# Altium PCB MCU_Board.PcbDoc
Units mil, origin at the board's own origin, x right, y up, seen from the top; angles counter-clockwise.
Board outline 2220 x 2405 mil, 2 copper layers (Top Layer, Bottom Layer); 38 components, 116 nets, 291 pads, 106 vias.
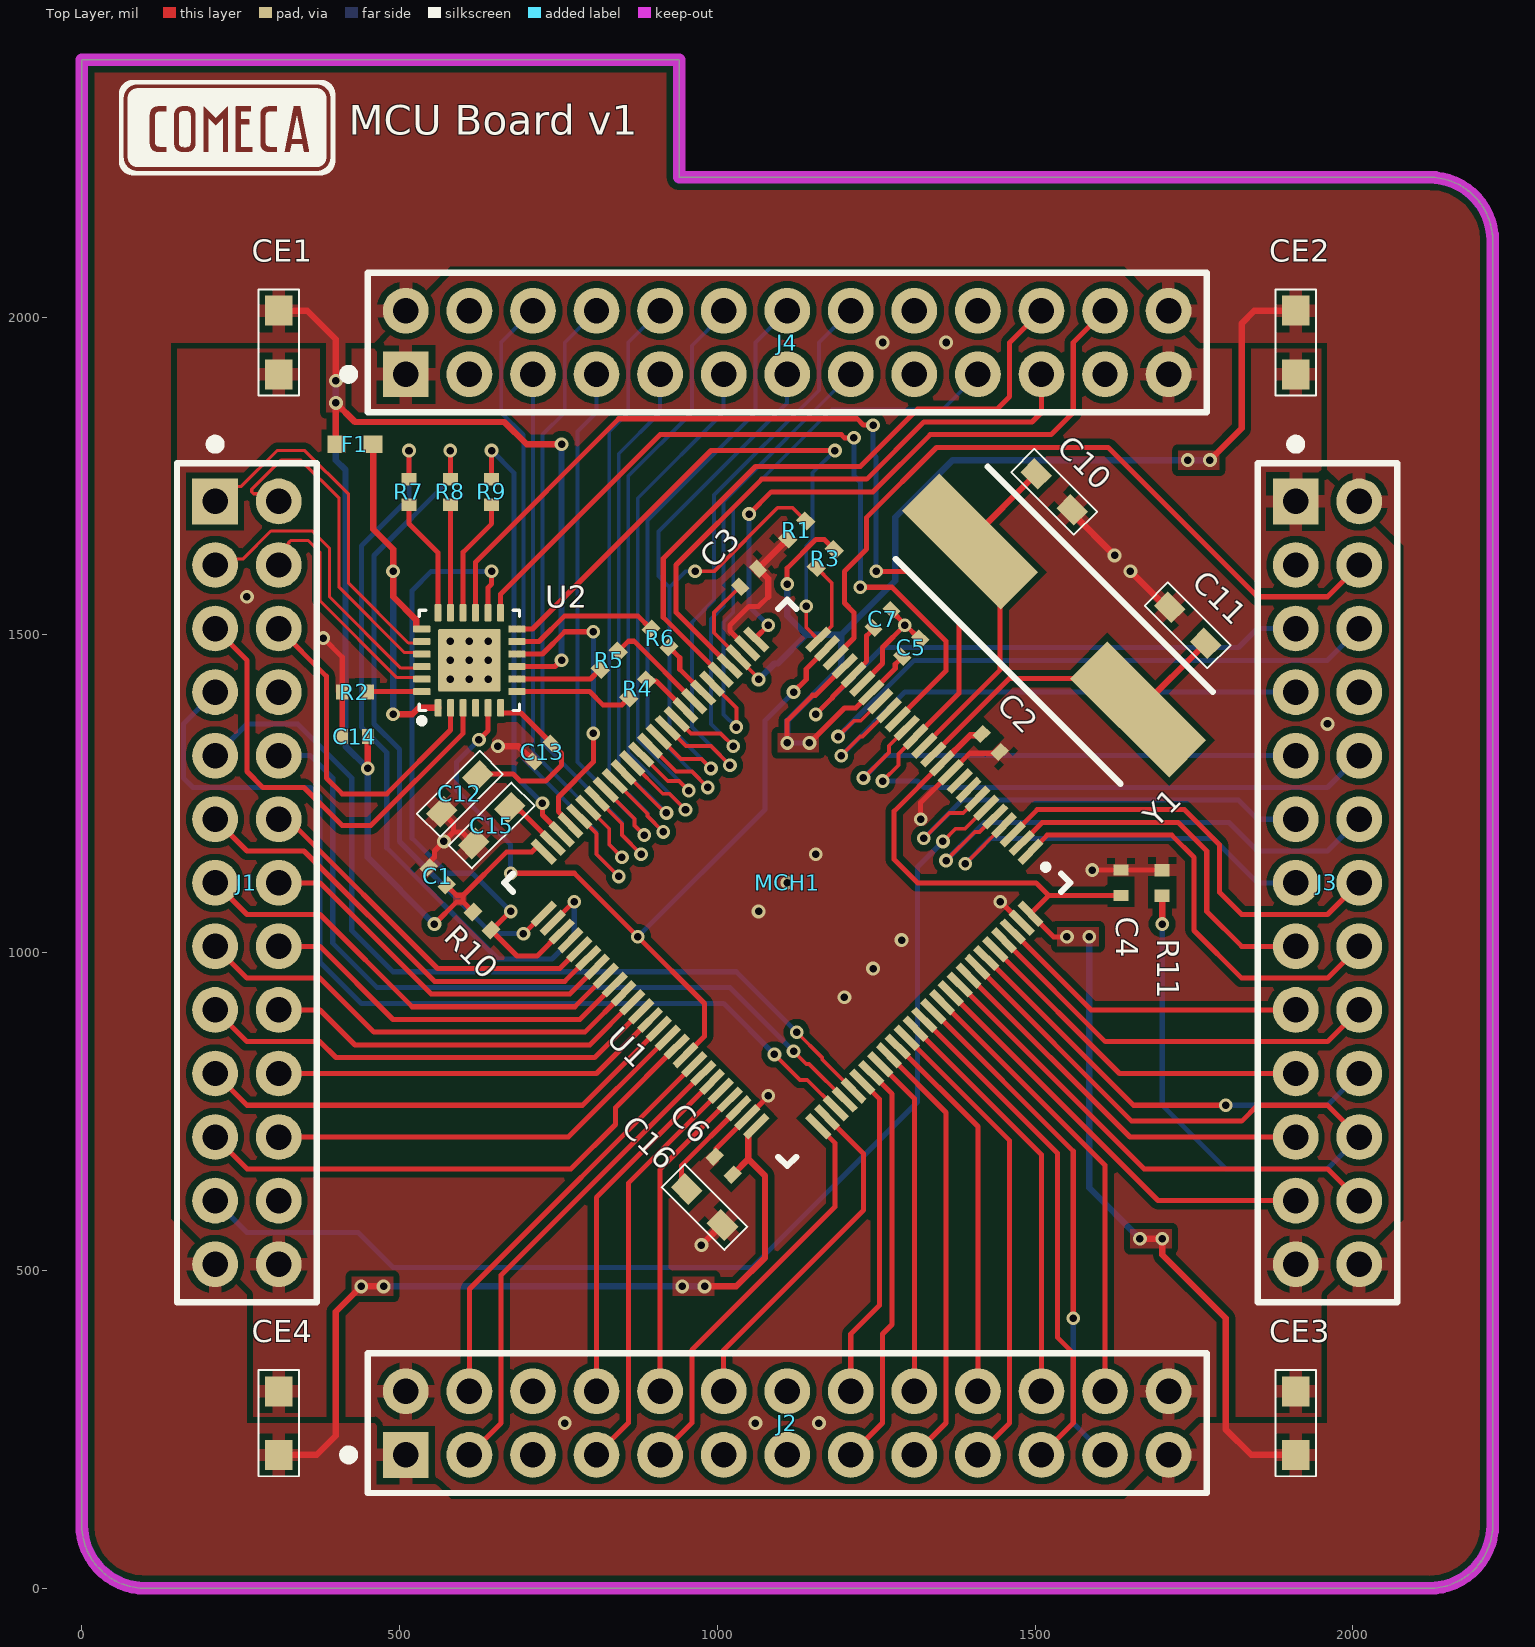
[diagram p0: Top Layer view]
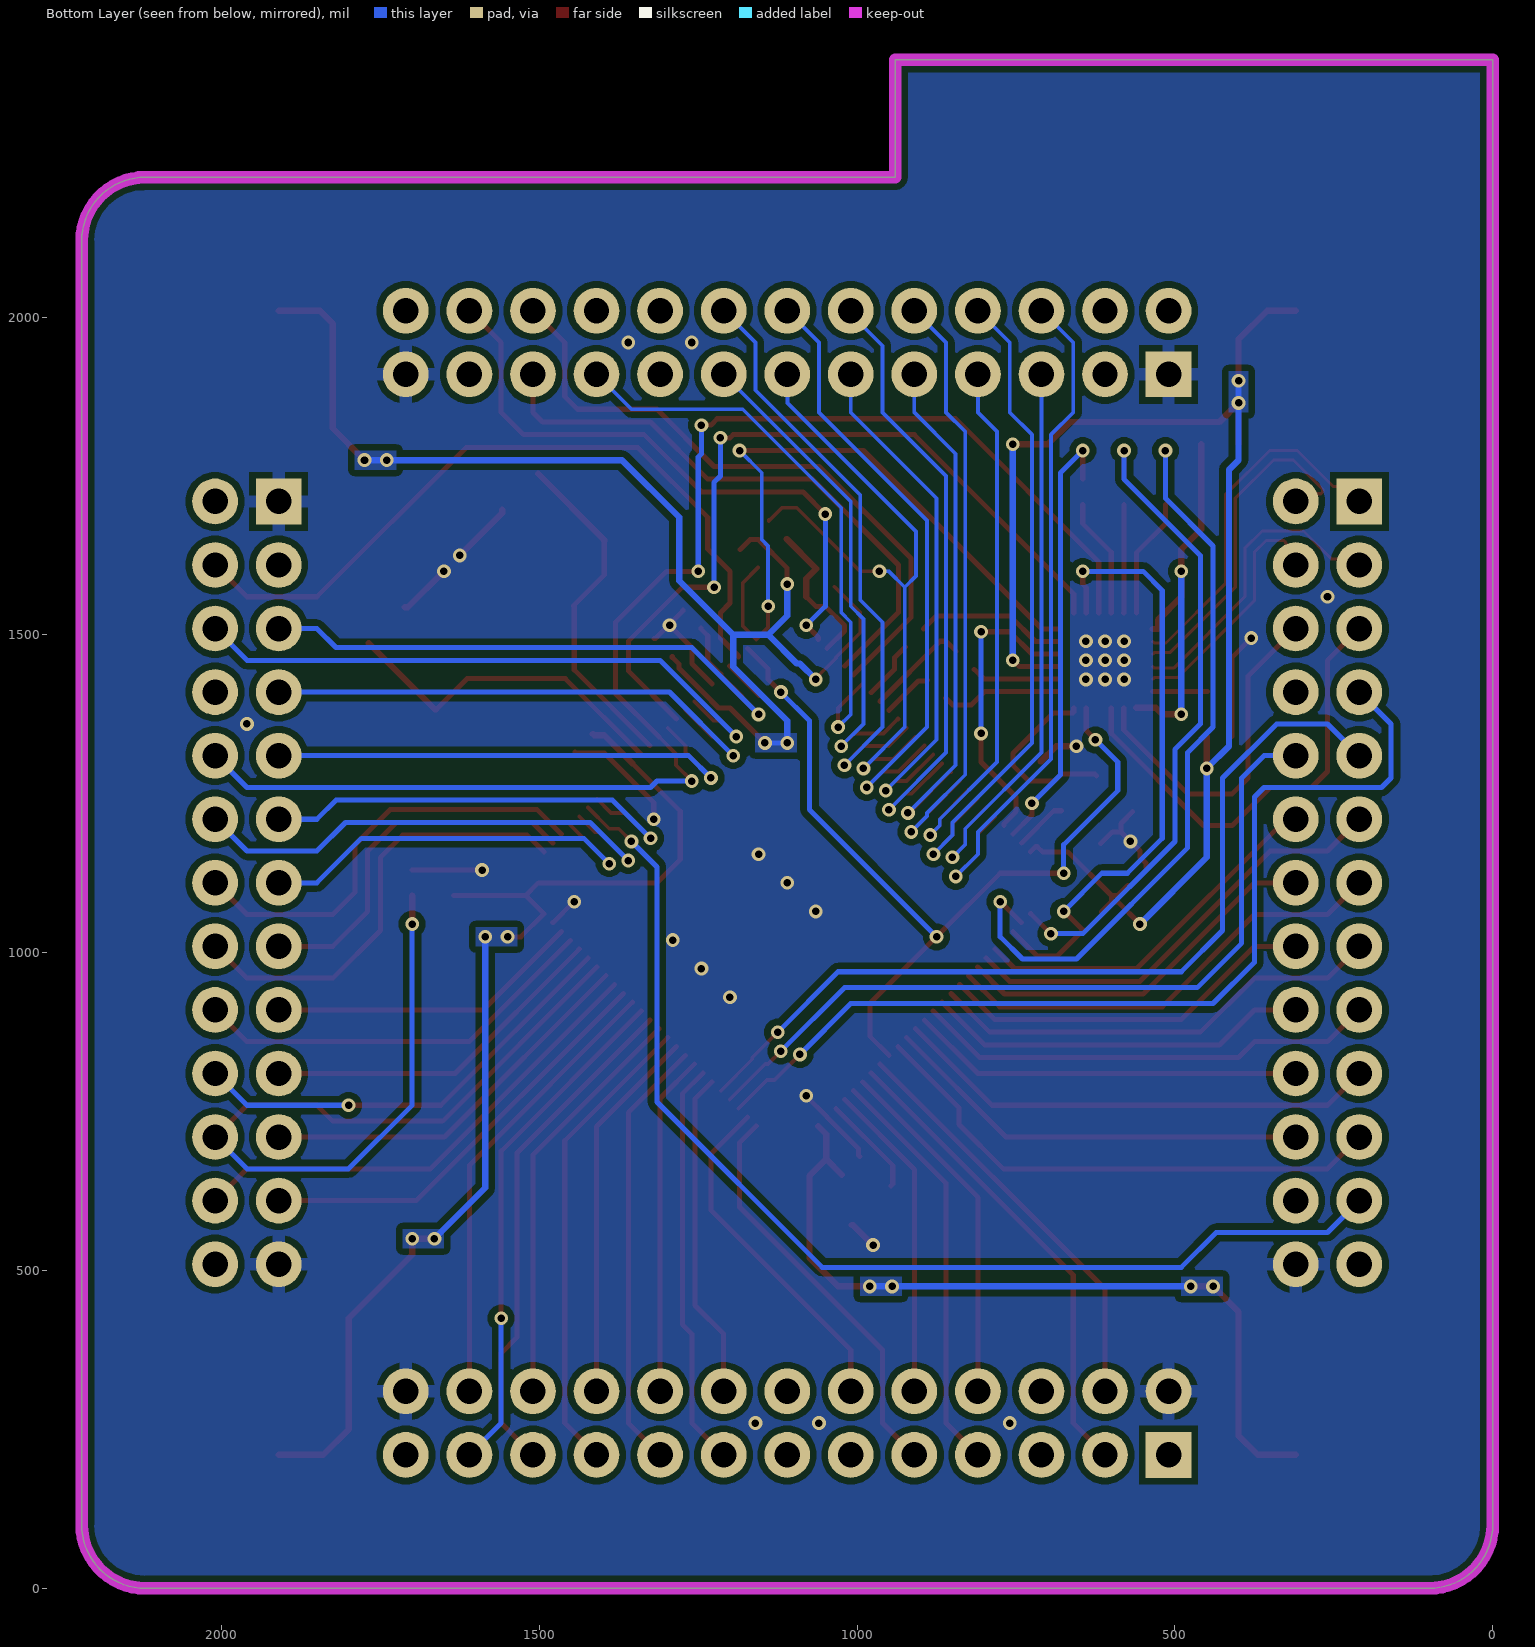
[diagram p1: Bottom Layer view, seen from below]
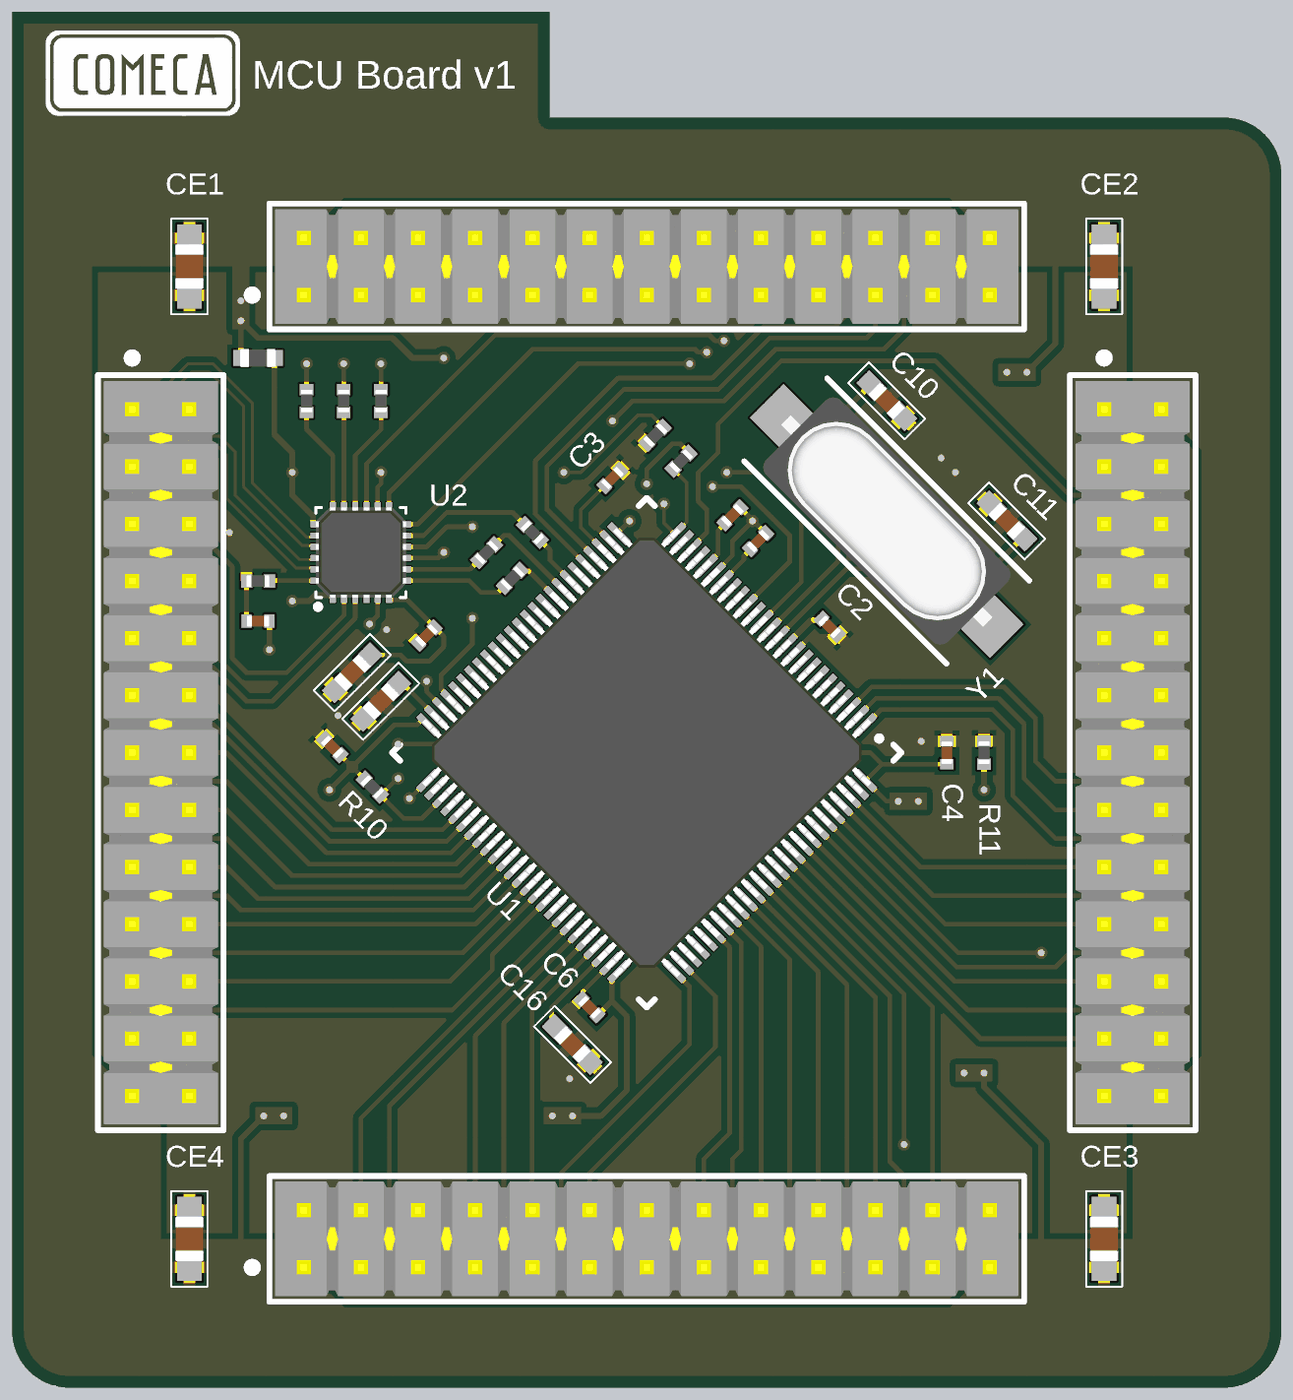
[diagram p2: 3D render of the assembled board from above, using the file's embedded part models]

## Layer stack, top to bottom
Top Solder: solder mask 0.4, Solder Resist, Dk 3.5
Top Layer: signal copper 1.4
Dielectric 1: dielectric 12.6, FR-4, Dk 4.8
Bottom Layer: signal copper 1.4
Bottom Solder: solder mask 0.4, Solder Resist, Dk 3.5

## Board outline
100,0 cw(c100,100) 0,100 0,2405 940,2405 940,2220 2120,2220 cw(c2120,2120) 2220,2120 2220,100 cw(c2120,100) 2120,0

## Design rules (kind name [scope] priority, off if disabled: settings)
BoardOutlineClearance [All] p1: gap=7.87 ignorepadtopadclearanceinfootprint=FALSE except(15.75: Arc-SplitBarrior Arc-SplitContinuation Track-SplitBarrior Track-SplitContinuation SMDPad-SplitBarrior SMDPad-SplitContinuation THPad-SplitBarrior THPad-SplitContinuation Via-SplitBarrior Via-SplitContinuation Fill-SplitBarrior Fill-SplitContinuation Poly-SplitBarrior Poly-SplitContinuation Region-SplitBarrior Region-SplitContinuation Text-SplitBarrior Text-SplitContinuation)
Clearance Clearance_Polygon [InPolygon] p1: gap=10 ignorepadtopadclearanceinfootprint=FALSE
Clearance Clearance_PolyPoly [InPolygon vs InPolygon] p2: gap=20 ignorepadtopadclearanceinfootprint=FALSE
Clearance "Clearance Bottom Layer" [OnLayer('Bottom Layer')] p3: gap=8 ignorepadtopadclearanceinfootprint=TRUE except(10: Arc-Text Track-Text SMDPad-Text THPad-Text Via-Text Fill-Text Poly-Text Region-Text Text-Text)
Clearance "Clearance Top Layer" [OnLayer('Top Layer')] p4: gap=8 ignorepadtopadclearanceinfootprint=TRUE except(10: Arc-Text Track-Text SMDPad-Text THPad-Text Via-Text Fill-Text Poly-Text Region-Text Text-Text)
Clearance [All] p5: gap=7.87 ignorepadtopadclearanceinfootprint=FALSE except(3.5: Arc-Arc Arc-Track Arc-SMDPad Track-Track Track-SMDPad SMDPad-SMDPad; 5: Arc-Via Track-Via SMDPad-Via THPad-Via Via-Via; 10: Arc-Text Track-Text SMDPad-Text THPad-Text Via-Text Fill-Text Poly-Text Region-Text Text-Text)
ComponentClearance MCH_Clearance [InComponent('MCH1')] p1: gap=-1 collisioncheckmode=3 verticalgap=-1 showdistances=FALSE
ComponentClearance [All] p2: gap=10 collisioncheckmode=3 verticalgap=10 showdistances=FALSE
DiffPairsRouting [All] p1: maxlimit=10 minlimit=5 mostfreqgap=10 toplayer_minwidth=5 toplayer_maxwidth=15 toplayer_prefwidth=15 bottomlayer_minwidth=5 bottomlayer_maxwidth=15 bottomlayer_prefwidth=15 maxuncoupledlength=500
HoleSize [All] p1: absolutevalues=TRUE maxlimit=248.03 minlimit=7.87 maxpercent=80.000 minpercent=20.000
MinimumAnnularRing [All] p1: minimumring=3
MinimumSolderMaskSliver [All] p1: minsoldermaskwidth=3.94
PolygonConnect PolygonConnect_1 [All] p1: thpad.connectstyle=Relief thpad.reliefconductorwidth=20 thpad.reliefentries=4 thpad.polygonreliefangle="90 Angle" thpad.airgapwidth=10 smdpad.connectstyle=Relief smdpad.reliefconductorwidth=20 smdpad.reliefentries=4 smdpad.polygonreliefangle="90 Angle" smdpad.airgapwidth=10 via.connectstyle=Direct via.reliefconductorwidth=20 via.reliefentries=4 via.polygonreliefangle="90 Angle" via.airgapwidth=10
RoutingCorners [All] p1: cornerstyle=Round minsetback=100 maxsetback=100
RoutingVias [All] p1: holewidth=19.68 width=39.37 viastyle="Through Hole" minholewidth=7.87 minwidth=17.72 maxholewidth=39.37 maxwidth=78.74
SilkToSilkClearance [All] p1: silktosilkclearance=3.94
SilkToSolderMaskClearance [IsPad] p1: minsilkscreentomaskgap=3.94 clearancetoexposedcopper=TRUE
SolderMaskExpansion [All] p1: expansion=4 istentingtop=FALSE
Width [All] p1: maxlimit=100 minlimit=5 preferedwidth=15 minimp=50.000000 maximp=50.000000 favimp=50.000000
23 further rules are at their usual default settings.

## Classes and differential pairs
differential pair class ETH: RX TX
component class UC: C1 C2 C3 C4 C5 C6 C7 C10 C11 C15 C16 CE1 CE2 CE3 CE4 R1 R11 U1 Y1
component class HDx: J1 J2 J3 J4 MCH1
component class ETH: C12 C13 C14 F1 R2 R3 R4 R5 R6 R7 R8 R9 R10 U2
differential pair TX: +TX_P -TX_N
differential pair RX: +RX_P -RX_N

## Components (designator, comment, footprint, x,y, rotation, side; value= is the part's Value field where it differs from the comment)
C1 "100nF" 0402-CAP-TDK 560,1120 r315 top
C2 "100nF" 0402-CAP-TDK 1430,1330 r135 top
C3 "100nF" 0402-CAP-TDK 1050,1590 r225 top
C4 "100nF" 0402-CAP-TDK 1635,1110 r270 top
C5 "100nF" 0402-CAP-TDK 1305,1480 r225 top
C6 "100nF" 0402-CAP-TDK 1010,665 r315 top
C7 "100nF" 0402-CAP-TDK 1260,1525 r45 top
C10 "22pF" 0603-CAP-TDK 1530,1725 r135 top
C11 "22pF" 0603-CAP-TDK 1740,1515 r315 top
C12 "2.2uF" 0603-CAP-TDK 595,1250 r45 top
C13 "100nF" 0402-CAP-TDK 725,1315 r45 top
C14 "100nF" 0402-CAP-TDK 430,1340 r0 top
C15 "2.2uF" 0603-CAP-TDK 645,1200 r45 top
C16 "2.2uF" 0603-CAP-TDK 980,600 r135 top
CE1 "10uF" 0805-CAP-TDK 310,1960 r90 top locked
CE2 "10uF" 0805-CAP-TDK 1910,1960 r90 top locked
CE3 "10uF" 0805-CAP-TDK 1910,260 r270 top locked
CE4 "10uF" 0805-CAP-TDK 310,260 r270 top locked
F1 "120R@100MHz" 0603-IND-MURATA 430,1800 r180 top
J1 "CON13X2" SIP13X2 260,1110 r270 top locked
J2 "CON13X2" SIP13X2 1110,260 r0 top locked
J3 "CON13X2" SIP13X2 1960,1110 r270 top locked
J4 "CON13X2" SIP13X2 1110,1960 r0 top locked
MCH1 "EASYMX-PRO-V7-SIP-GUIDE" EASYMX-PRO-V7-MCH-GUIDE 1110,1110 r0 top locked
R1 "100K" 0402-RES-PANASONIC 1125,1665 r45 top
R2 "12K1" 0402-RES-PANASONIC 430,1410 r0 top
R3 "1K5" 0402-RES-PANASONIC 1170,1620 r225 top
R4 "27" 0402-RES-PANASONIC 875,1415 r225 top
R5 "27" 0402-RES-PANASONIC 830,1460 r225 top
R6 "27" 0402-RES-PANASONIC 910,1495 r135 top
R7 "27" 0402-RES-PANASONIC 515,1725 r270 top
R8 "27" 0402-RES-PANASONIC 580,1725 r270 top
R9 "27" 0402-RES-PANASONIC 645,1725 r270 top
R10 "10K" 0402-RES-PANASONIC 630,1050 r315 top
R11 "100K" 0402-RES-PANASONIC 1700,1110 r90 top
U1 "STM32F407VGT6" LQFP-100 1110,1110 r135 top locked
U2 "LAN8720A-CP" "MC 24-QFN-PUNCH" 610,1460 r90 top locked
Y1 "ABLS-LR-25.000MHZ-F-T" HC49S 1530,1515 r135 top locked

## Footprints (in the part's own frame and the unit in brackets; to place one, negate y for a bottom-side part, rotate by r counter-clockwise, add the part's x,y. Pads: shape width x height; smd on the part's side, far side on the other; paste and mask are expansions set on the pad)
0402-CAP-TDK [mm]
  rect 0.45x0.6 smd: 1(-0.508,0) 2(0.508,0)
  body extent -0.5,-0.25 0.5,0.25, height 0.55
0402-RES-PANASONIC [mm]
  rect 0.5x0.6 smd: 1(-0.508,0) 2(0.508,0)
  body extent -0.5,-0.25 0.5,0.25, height 0.35
0603-CAP-TDK [mm]
  rect 1x0.8 smd: 1(-1.016,0) 2(1.016,0)
  silkscreen extent -1.77,-0.65 1.77,0.65, body extent -0.8,-0.4 0.8,0.4, height 0.9
0603-IND-MURATA [mm]
  rect 0.75x0.7 smd: 1(-0.725,0) 2(0.725,0)
  body extent -0.8,-0.4 0.8,0.4, height 0.96
0805-CAP-TDK [mm]
  rect 1.2x1.1 smd: 1(-1.27,0) 2(1.27,0)
  silkscreen extent -2.12,-0.8 2.12,0.8, body extent -1,-0.63 1,0.63, height 1.45
EASYMX-PRO-V7-MCH-GUIDE [mil]
HC49S [mil]
  rect 220x83 smd: 1(-187,0) 2(187,0)
  silkscreen extent -250,-102 250,102, body extent -250,-93 250,93, height 165
LQFP-100 [mm]
  rect 0.3x1.2 smd mask+0.05: 1(-6,-7.75) 2(-5.5,-7.75) 3(-5,-7.75) 4(-4.5,-7.75) 5(-4,-7.75) 6(-3.5,-7.75) 7(-3,-7.75) 8(-2.5,-7.75) 9(-2,-7.75) 10(-1.5,-7.75) 11(-1,-7.75) 12(-0.5,-7.75) 13(0,-7.75) 14(0.5,-7.75) 15(1,-7.75) 16(1.5,-7.75) 17(2,-7.75) 18(2.5,-7.75) 19(3,-7.75) 20(3.5,-7.75) 21(4,-7.75) 22(4.5,-7.75) 23(5,-7.75) 24(5.5,-7.75) 25(6,-7.75) 51(6,7.75) 52(5.5,7.75) 53(5,7.75) 54(4.5,7.75) 55(4,7.75) 56(3.5,7.75) 57(3,7.75) 58(2.5,7.75) 59(2,7.75) 60(1.5,7.75) 61(1,7.75) 62(0.5,7.75) 63(0,7.75) 64(-0.5,7.75) 65(-1,7.75) 66(-1.5,7.75) 67(-2,7.75) 68(-2.5,7.75) 69(-3,7.75) 70(-3.5,7.75) 71(-4,7.75) 72(-4.5,7.75) 73(-5,7.75) 74(-5.5,7.75) 75(-6,7.75)
  rect 1.2x0.3 smd mask+0.05: 26(7.75,-6) 27(7.75,-5.5) 28(7.75,-5) 29(7.75,-4.5) 30(7.75,-4) 31(7.75,-3.5) 32(7.75,-3) 33(7.75,-2.5) 34(7.75,-2) 35(7.75,-1.5) 36(7.75,-1) 37(7.75,-0.5) 38(7.75,0) 39(7.75,0.5) 40(7.75,1) 41(7.75,1.5) 42(7.75,2) 43(7.75,2.5) 44(7.75,3) 45(7.75,3.5) 46(7.75,4) 47(7.75,4.5) 48(7.75,5) 49(7.75,5.5) 50(7.75,6) 76(-7.75,6) 77(-7.75,5.5) 78(-7.75,5) 79(-7.75,4.5) 80(-7.75,4) 81(-7.75,3.5) 82(-7.75,3) 83(-7.75,2.5) 84(-7.75,2) 85(-7.75,1.5) 86(-7.75,1) 87(-7.75,0.5) 88(-7.75,0) 89(-7.75,-0.5) 90(-7.75,-1) 91(-7.75,-1.5) 92(-7.75,-2) 93(-7.75,-2.5) 94(-7.75,-3) 95(-7.75,-3.5) 96(-7.75,-4) 97(-7.75,-4.5) 98(-7.75,-5) 99(-7.75,-5.5) 100(-7.75,-6)
  silkscreen extent -8,-8 8,8, body extent -8,-8 8,8, height 1.6
"MC 24-QFN-PUNCH" [mm]
  rrect25% 0.69x0.28 smd mask+0.05: 1(-1.9,1.25) 2(-1.9,0.75) 3(-1.9,0.25) 4(-1.9,-0.25) 5(-1.9,-0.75) 6(-1.9,-1.25) 13(1.9,-1.25) 14(1.9,-0.75) 15(1.9,-0.25) 16(1.9,0.25) 17(1.9,0.75) 18(1.9,1.25)
  rrect25% 0.28x0.69 smd mask+0.05: 7(-1.25,-1.9) 8(-0.75,-1.9) 9(-0.25,-1.9) 10(0.25,-1.9) 11(0.75,-1.9) 12(1.25,-1.9) 19(1.25,1.9) 20(0.75,1.9) 21(0.25,1.9) 22(-0.25,1.9) 23(-0.75,1.9) 24(-1.25,1.9)
  rrect5% 2.5x2.5 smd mask+0.05: 25(0,0)
  silkscreen extent -2.51,-2 2,2.01, body extent -2,-2 2,2, height 1.01
SIP13X2 [mil]
  rect 72x72 hole 40: 1(-600,-50)
  round 72 hole 40: 2(-600,50) 3(-500,-50) 4(-500,50) 5(-400,-50) 6(-400,50) 7(-300,-50) 8(-300,50) 9(-200,-50) 10(-200,50) 11(-100,-50) 12(-100,50) 13(0,-50) 14(0,50) 15(100,-50) 16(100,50) 17(200,-50) 18(200,50) 19(300,-50) 20(300,50) 21(400,-50) 22(400,50) 23(500,-50) 24(500,50) 25(600,-50) 26(600,50)
  silkscreen extent -700,-110 660,110, body extent -650,-100 650,100, height 330

## Part data
C1 C2 C3 C4 C5 C6 C7 C10 C11 C12 C13 C14 C15 C16 CE1 CE2 CE3 CE4: library part CAP-SMD
F1: library part BLM18BD121SN1D
MCH1: "EasyMx Pro V7 mechanical centers for SIP connectors"
R1 R2 R3 R4 R5 R6 R7 R8 R9 R10 R11: library part RES-SMD
Y1: library part "25.000MHz Crystal"

## Via types
v1: diameter 21.65, hole 11.81, Top Layer to Bottom Layer, tented both sides, 106 vias

## Nets (pads, with @x,y where several pads share a name; then routed paths per layer and width w, separated by ;. In a path a pad name is that pad's centre, name@x,y a point inside that pad or via, vN(x,y) a via of type N, cw(c..) or ccw(c..) an arc to the next point about the centre after c; other vN are vias at no path point)
BT0: J3.22 R11.1 U1.94 | length 1434.5
  Top Layer w8: U1.94 1652.03,735 1825,735 1850,760 1960,760 J3.22
  Top Layer w10: v1(1700,1045) R11.1
  Bottom Layer w8: v1(1700,1045) 1700,760 1800,660 1960,660 J3.22
CRS_DV: R6.1 U1.32 | length 93.8
  Top Layer w8: R6.1 941.02,1463.98 941.02,1446.02 U1.32
GND: C1.1 C2.1 C3.1 C4.1 C5.1 C6.1 C7.2 C10.1 C11.1 C12.1 C13.1 C14.1 C15.1 C16.1 CE1.1 CE2.1 CE3.1 CE4.1 J1.26 J2.2 J2.26 J3.1 J3.25 J4.1 J4.25 R1.1 R2.1 R11.2 U1.10 U1.20 U1.27 U1.74 U1.99 U2.25 | length 1514.4
  Top Layer w8: v1(380,1495) 410,1465 R2.1 C14.1 ; C1.1 545.86,1141.01 555,1150.15 555,1160 v1(570,1175) 585,1190 ; C12.1 585,1203.43 585,1190 ; C15.1 598.43,1190 585,1190 ; C6.1 997.95,681.23 997.95,691.72 U1.74 1047.36,741.75 1080,774.39 v1(1080,775) ; U1.27 1020,1506.23 1020,1515 1050,1545 1065,1545 1080,1560 ; U1.20 1260,1454.87 1260,1480 v1(1295,1515) ; C7.2 1274.14,1537.5 1295,1516.64 v1(1295,1515) ; C5.1 1317.5,1494.14 1296.64,1515 v1(1295,1515) ; v1(1320,1210) 1320,1236.48 U1.10 1397.29,1313.77 1442.05,1313.77 C2.1 ; v1(1445,1080) 1445.61,1080 1478.25,1047.36 U1.99 ; v1(1590,1130) C4.1 R11.2
  Top Layer w10: v1(655,1325) 686.72,1325 C13.1 ; v1(975,540) 1006.72,571.72 C16.1 ; 1080,1560 1080,1588.28 C3.1 R1.1 ; C10.1 1558.28,1691.72 v1(1625,1625) ; v1(1650,1600) 1706.72,1543.28 C11.1
  other v1: 760,260 1060,260 1160,260 1200,930 1245,975 1290,1020 1065,1065 1110,1110 1155,1155 1960,1360 580,1430 610,1430 640,1430 580,1460 610,1460 640,1460 580,1490 610,1490 640,1490 260,1560 1260,1960 1360,1960
LED1: J1.5 U2.3 | length 721.2
  Top Layer w8: J1.5 260,1460 260,1285 285,1260 350,1260 410,1200 455,1200 600.16,1345.16 U2.3
LED2: J1.6 U2.2 | length 548.2
  Top Layer w8: J1.6 385,1435 385,1275 410,1250 480,1250 580.47,1350.47 U2.2
MCO: U1.24 U1.67 U2.5 | length 1376.9
  Top Layer w8: v1(625,1335) 639.53,1349.53 U2.5 ; v1(675,1125) 775,1125 v1(875,1025) 980,920 980,868.64 U1.67 ; v1(1119.96,1410.04) v1(1119.96,1410.04) 1140,1430 1140,1446.23 U1.24
  Bottom Layer w8: v1(625,1335) 590,1300 590,1255 675,1170 v1(675,1125) ; v1(875,1025) 1075,1225 1075,1365 v1(1119.96,1410.04) v1(1119.96,1410.04)
MDC: U1.16 U2.13 | length 1254.5
  Top Layer w8: U2.13 659.21,1564.21 910,1815 1195,1815 1200,1810 v1(1215,1810) ; v1(1225,1575) 1275,1575 1360,1490 1360,1443.52 U1.16
  Bottom Layer w8: v1(1215,1810) 1215,1750 1225,1740 v1(1225,1575)
MDIO: R3.2 U1.25 U2.12 | length 1072
  Top Layer w6: v1(1140,1545) 1140,1511.5 U1.25 1180,1514.07 1180,1581.72 R3.2
  Top Layer w8: U2.12 709.21,1509.21 990,1790 v1(1185,1790)
  Bottom Layer w6: v1(1140,1545) 1140,1640 1150,1650 1150,1755 v1(1185,1790)
NetC10_2: C10.2 U1.13 Y1.2 | length 540.5
  Top Layer w8: U1.13 1445,1445 1445,1544.55 1446.21,1545.76 1397.77,1594.2 Y1.2
  Top Layer w10: Y1.2 1397.77,1649.34 C10.2
NetC11_2: C11.2 U1.12 Y1.1 | length 541.2
  Top Layer w8: U1.12 1459.05,1431.21 1613.79,1431.21 Y1.1
  Top Layer w10: Y1.1 1664.34,1382.77 C11.2
NetC12_2: C12.2 C13.2 U2.6 | length 295.6
  Top Layer w8: C12.2 626.07,1281.07 678.93,1281.07 690,1270 730,1270 755,1295 755,1313.28 C13.2 691.29,1376.99 660.72,1376.99 659.21,1378.5 U2.6
NetC15_2: C15.2 U1.49 | length 83.8
  Top Layer w8: C15.2@678.28,1223.28 690.49,1223.28 U1.49
NetC16_2: C16.2 U1.73 | length 160
  Top Layer w8: C16.2@946.72,633.28 943.93,636.07 943.93,665.54 U1.73
NetJ1_8: J1.8
NetJ1_24: J1.24
NetJ2_5: J2.5
NetJ2_6: J2.6
NetJ2_11: J2.11
NetJ2_13: J2.13
NetJ2_14: J2.14
NetJ3_3: J3.3
NetJ3_8: J3.8
NetJ4_3: J4.3
NetJ4_4: J4.4
NetJ4_17: J4.17
NetJ4_18: J4.18
NetJ4_20: J4.20
NetJ4_23: J4.23
NetR2_2: R2.2 U2.24 | length 86
  Top Layer w8: R2.2@449.21,1410.79 U2.24
NetR4_2: R4.2 U2.7 | length 189.2
  Top Layer w8: U2.7 799.21,1410.79 820,1390 850,1390 R4.2
NetR5_2: R5.2 U2.8 | length 137.4
  Top Layer w8: U2.8 800.47,1430.47 R5.2
NetR6_2: R6.2 U2.11 | length 236.5
  Top Layer w8: U2.11 719.53,1489.53 760,1530 875,1530 R6.2
NetR7_2: R7.2 U2.18 | length 189.2
  Top Layer w8: R7.2 515,1675 560.79,1629.21 U2.18
NetR8_2: R8.2 U2.17 | length 170.3
  Top Layer w8: R8.2@580.24,1705 580.24,1535.04 U2.17
NetR9_2: R9.2 U2.16 | length 188.8
  Top Layer w8: U2.16 600.16,1630.16 645,1675 R9.2
nINT: R10.2 U1.53 U2.14 | length 984.2
  Top Layer w8: U2.14 639.53,1574.53 645,1580 v1(645,1600) ; v1(675,1065) 674.14,1065 645,1035.86 R10.2 685,995 716.61,995 U1.53
  Bottom Layer w8: v1(645,1600) 550,1600 520,1570 520,1180 575,1125 615,1125 v1(675,1065)
nRST: J3.10 U1.14 U2.15 | length 2272.4
  Top Layer w6: v1(1260,1270) 1285,1295 1285,1312.84 U1.14
  Top Layer w8: U2.15 619.84,1614.84 845,1840 1220,1840 1230,1830 v1(1245,1830) ; v1(1250,1600) 1300,1600 1380,1520 1380,1407.84 U1.14
  Bottom Layer w8: v1(1245,1830) 1245,1785 1250,1780 v1(1250,1600) ; v1(1260,1270) 1315,1270 1325,1260 1960,1260 J3.10
PA0: J3.4 U1.23 | length 1191.2
  Top Layer w8: U1.23 1186.56,1466.72 1215,1495.16 1215,1535 1200,1550 1200,1600 1235,1635 1235,1685 1345,1795 1615,1795 1850,1560 1960,1560 J3.4
PA3: J4.24 U1.26 | length 974.7
  Top Layer w8: v1(1050,1690) 1085,1725 1245,1725 1335,1815 1525,1815 1560,1850 1560,1960 J4.24 ; U1.26 1060.88,1493.19 1060.88,1495.88 v1(1080,1515)
  Bottom Layer w8: v1(1050,1690) 1050,1545 v1(1080,1515)
PA4: J4.21 U1.29 | length 928.4
  Top Layer w8: U1.29 935,1535.55 935,1610 1070,1745 1235,1745 1325,1835 1495,1835 1510,1850 J4.21
PA5: J4.22 U1.30 | length 1026.8
  Top Layer w8: U1.30 915,1527.71 915,1620 1060,1765 1225,1765 1315,1855 1440,1855 1460,1875 1460,1960 J4.22
PA6: J4.19 U1.31 | length 915.5
  Top Layer w6: U1.31 1030,1384.87 v1(1030,1355)
  Bottom Layer w6: v1(1030,1355) 1010,1375 1010,1520 1025,1535 1025,1700 1180,1855 1355,1855 J4.19
PA9: J2.4 U1.68 | length 661.2
  Top Layer w8: J2.4 610,470.81 U1.68
PA10: J2.3 U1.69 | length 753.1
  Top Layer w8: J2.3 660,260 660,492.97 U1.69
PA11: J2.8 U1.70 | length 562.1
  Top Layer w8: J2.8 810,615.13 U1.70
PA12: J2.7 U1.71 | length 653.9
  Top Layer w8: J2.7 860,260 860,637.29 U1.71
PA13: J2.10 U1.72 | length 504.6
  Top Layer w8: J2.10 909.66,310.34 909.66,659.11 U1.72
PA14: J2.9 U1.76 | length 642
  Top Layer w8: J2.9 960,260 960,375 1185,600 1185,700.93 U1.76
PA15: J2.12 U1.77 | length 546
  Top Layer w8: J2.12 1010,375 1230,595 1230,683.77 U1.77
PB0: J4.15 U1.35 | length 797.2
  Top Layer w6: U1.35 958.52,1345 1005,1345 v1(1025,1325)
  Bottom Layer w6: v1(1025,1325) 990,1360 990,1525 1010,1545 1010,1710 J4.15
PB1: J4.16 U1.36 | length 965.6
  Top Layer w6: U1.36 950.68,1325 990,1325 v1(1020,1295)
  Bottom Layer w6: v1(1020,1295) 960,1355 960,1520 995,1555 995,1720 1160,1885 1160,1960 J4.16
PB2: J4.13 R1.2 U1.37 | length 1116.7
  Top Layer w6: U1.37 942.84,1305 975,1305 v1(990,1290) ; v1(965,1600) 995,1600 1095,1700 1118.28,1700 R1.2 R1.2@1139.14,1680.86
  Bottom Layer w6: v1(965,1600) 950,1600 925,1575 ; v1(990,1290) 925,1355 925,1575 ; J4.13 1109.66,1909.66 1109.66,1864.66 907.49,1662.49 907.49,1592.51 925,1575
PB3: J2.23 U1.89 | length 810.1
  Top Layer w8: U1.89 1560,687.84 v1(1560,425)
  Bottom Layer w8: v1(1560,425) 1560,260 J2.23
PB4: J2.24 U1.90 | length 718.3
  Top Layer w8: U1.90 1610,665.68 J2.24
PB5: J3.23 U1.91 | length 677.5
  Top Layer w8: U1.91 1693.52,610 J3.23
PB6: J3.24 U1.92 | length 769.4
  Top Layer w8: U1.92 1671.36,660 1960,660 J3.24
PB7: J3.21 U1.93 | length 619.8
  Top Layer w8: U1.93 1649.19,710 J3.21
PB8: J3.20 U1.95 | length 703.5
  Top Layer w8: U1.95 1654.87,760 v1(1800,760)
  Bottom Layer w8: v1(1800,760) 1960,760 J3.20
PB9: J3.19 U1.96 | length 553.9
  Top Layer w8: U1.96 1632.71,810 J3.19
PC0: J3.9 U1.15 | length 801.2
  Top Layer w6: v1(1230,1275) 1270,1315 1270,1325.68 U1.15
  Bottom Layer w8: v1(1230,1275) 1265,1310 J3.9
PC2: J3.7 U1.17 | length 861.1
  Top Layer w6: v1(1195,1310) 1225,1340 1228.64,1340 U1.17
  Bottom Layer w8: v1(1195,1310) 1295,1410 J3.7
PC3: J3.6 U1.18 | length 979.5
  Top Layer w6: v1(1190,1340) 1215,1365 1225.81,1365 U1.18
  Bottom Layer w8: v1(1190,1340) 1310,1460 1960,1460 J3.6
PC6: J1.20 U1.63 | length 619.1
  Top Layer w8: J1.20 810,810 U1.63
PC7: J1.19 U1.64 | length 768.7
  Top Layer w8: J1.19 260,760 787.84,760 U1.64
PC8: J1.22 U1.65 | length 676.9
  Top Layer w8: J1.22 765.68,710 U1.65
PC9: J1.21 U1.66 | length 842
  Top Layer w8: J1.21 260,660 770,660 839.76,729.76 839.76,756.25 U1.66
PC13: J3.11 U1.7 | length 732.3
  Top Layer w6: v1(1325,1180) 1365,1220 1387.03,1220 U1.7
  Bottom Layer w8: v1(1325,1180) 1385,1240 1820,1240 1850,1210 J3.11
PD0: J2.16 U1.81 | length 516.5
  Top Layer w8: J2.16 1210,400 1255,445 1255,770.13 U1.81
PD1: J2.15 U1.82 | length 641.2
  Top Layer w8: J2.15 1260,260 1260,400 1275,415 1275,777.97 U1.82
PD2: J2.18 U1.83 | length 537
  Top Layer w8: U1.83 1310,770.81 J2.18
PD3: J2.17 U1.84 | length 686.5
  Top Layer w8: U1.84 1360,748.64 1360,260 J2.17
PD4: J2.20 U1.85 | length 594.7
  Top Layer w8: U1.85 1410,726.48 J2.20
PD5: J2.19 U1.86 | length 744.3
  Top Layer w8: U1.86 1460,704.32 1460,260 J2.19
PD6: J2.22 U1.87 | length 652.4
  Top Layer w8: U1.87 1510,682.16 J2.22
PD7: J2.21 U1.88 | length 802
  Top Layer w8: U1.88 1535,685 1535,395 1560,370 1560,260 J2.21
PD8: J1.12 U1.55 | length 582.9
  Top Layer w8: J1.12 325,1210 560,975 752.29,975 U1.55
PD9: J1.11 U1.56 | length 707.6
  Top Layer w8: J1.11 260,1160 350,1160 555,955 760.13,955 U1.56
PD10: J1.14 U1.57 | length 590.9
  Top Layer w8: J1.14 375,1110 550,935 767.97,935 U1.57
PD11: J1.13 U1.58 | length 715.7
  Top Layer w8: J1.13 260,1060 375,1060 520,915 775.81,915 U1.58
PD12: J1.16 U1.59 | length 599
  Top Layer w8: J1.16 375,1010 490,895 783.64,895 U1.59
PD13: J1.15 U1.60 | length 723.7
  Top Layer w8: J1.15 260,960 375,960 460,875 791.48,875 U1.60
PD14: J1.18 U1.61 | length 607
  Top Layer w8: J1.18 375,910 430,855 799.32,855 U1.61
PD15: J1.17 U1.62 | length 731.7
  Top Layer w8: J1.17 260,860 375,860 400,835 807.16,835 U1.62
PE0: J3.18 U1.97 | length 645.8
  Top Layer w8: U1.97 1610.55,860 1960,860 J3.18
PE1: J3.17 U1.98 | length 496.2
  Top Layer w8: U1.98 1588.39,910 J3.17
PE2: J3.16 U1.1 | length 709.4
  Top Layer w8: U1.1 1519.07,1185 1715,1185 1750,1150 1750,1035 1825,960 1960,960 J3.16
PE3: J3.15 U1.2 | length 581
  Top Layer w8: U1.2 1511.23,1205 1725,1205 1770,1160 1770,1065 1825,1010 J3.15
PE4: J3.14 U1.3 | length 694
  Top Layer w8: U1.3 1503.39,1225 1735,1225 1790,1170 1790,1095 1825,1060 1960,1060 J3.14
PE5: J3.13 U1.4 | length 651.4
  Top Layer w6: v1(1390,1140) 1390.27,1140 U1.4@1450.75,1200.48
  Bottom Layer w8: v1(1390,1140) 1430,1180 1780,1180 1850,1110 J3.13
PE6: J3.12 U1.5 | length 820.1
  Top Layer w6: v1(1360,1145) 1405,1190 1412.71,1190 U1.5
  Bottom Layer w8: v1(1360,1145) 1420,1205 1805,1205 1850,1160 1960,1160 J3.12
PE7: J4.14 U1.38 | length 998.5
  Top Layer w6: U1.38 935,1285 960,1285 v1(985,1260)
  Bottom Layer w6: v1(985,1260) 890,1355 890,1680 1060,1850 1060,1960 J4.14
PE8: J4.11 U1.39 | length 842.3
  Top Layer w6: U1.39 922.16,1270 940,1270 v1(955,1255)
  Bottom Layer w6: v1(955,1255) 875,1335 875,1715 1010,1850 J4.11
PE9: J4.12 U1.40 | length 998.2
  Top Layer w6: U1.40 914.32,1250 925,1250 v1(950,1225)
  Bottom Layer w6: v1(950,1225) 860,1315 860,1750 960,1850 960,1955 1010,2005 J4.12
PE10: J4.9 U1.41 | length 842
  Top Layer w6: U1.41 854.25,1283.99 918.24,1220 v1(920,1220)
  Bottom Layer w6: J4.9 910,1850 845,1785 845,1295 v1(920,1220)
PE11: J4.10 U1.42 | length 1000.1
  Top Layer w6: U1.42 890,1218.64 890,1215 v1(915,1190)
  Bottom Layer w6: J4.10 860,1960 860,1850 830,1820 830,1280 890,1220 890,1215 v1(915,1190)
PE12: J4.7 U1.43 | length 877.1
  Top Layer w6: U1.43 870,1210.81 870,1200 v1(885,1185)
  Bottom Layer w6: J4.7 810,1850 780,1820 780,1300 870,1210 870,1200 v1(885,1185)
PE13: J4.8 U1.44 | length 1070.3
  Top Layer w6: U1.44 850,1202.97 850,1185 v1(880,1155)
  Bottom Layer w6: J4.8 760,1960 760,1850 725,1815 725,1330 850,1205 850,1185 v1(880,1155)
PE14: J4.5 U1.45 | length 918.4
  Top Layer w6: U1.45 830,1195.13 830,1170 v1(850.04,1150.04) v1(850.04,1150.04)
  Bottom Layer w6: J4.5 710,1315 830,1195 830,1170 v1(850.04,1150.04) v1(850.04,1150.04)
PE15: J4.6 U1.46 | length 1107.5
  Top Layer w6: U1.46 810,1187.29 810,1155 v1(845,1120)
  Bottom Layer w6: J4.6 660,1960 660,1850 695,1815 695,1305 810,1190 810,1155 v1(845,1120)
RX_N: J1.3 U2.22 | length 482.3
  Top Layer w5: J1.3 219.26,1619.26 253.5,1619.26 297.74,1663.5 362.71,1663.5 390,1636.21 390,1560 502.18,1447.82 532.85,1447.82 U2.22
RX_P: J1.4 U2.23 | length 387.6
  Top Layer w5: J1.4 310,1628.13 325.95,1644.08 325.95,1645.57 328.88,1648.5 356.5,1648.5 375,1630 375,1553.79 495.97,1432.82 532.85,1432.82 U2.23
RXD0: R5.1 U1.33 | length 165.5
  Top Layer w8: R5.1 860,1490 869.19,1490 U1.33
RXD1: R4.1 U1.34 | length 80.5
  Top Layer w8: R4.1 890.53,1427.75 903.61,1427.75 U1.34
RXER: U1.47 U2.10 | length 469.9
  Top Layer w8: U2.10 724.84,1469.84 760,1505 v1(805,1505) ; U1.47 768.97,1202.99 750.01,1221.95 750.01,1245.01 805,1300 v1(805,1345)
  Bottom Layer w8: v1(805,1345) v1(805,1505)
SPI_MISO: J1.10 U1.79 | length 1266.9
  Top Layer w6: v1(1120,845) 1140,825 1144.45,825 U1.79
  Bottom Layer w8: J1.10 360,1310 395,1275 395,1015 465,945 1020,945 v1(1120,845)
SPI_MOSI: J1.9 U1.80 | length 1406.3
  Top Layer w6: v1(1125,875) 1165,835 1165,832.29 U1.80
  Bottom Layer w8: J1.9 260,1360 340,1360 425,1275 425,1035 490,970 1030,970 v1(1125,875)
SPI_SCK: J1.7 U1.78 | length 1549.9
  Top Layer w6: v1(1090,840) 1130,800 1141.61,800 U1.78
  Bottom Layer w8: J1.7 160,1360 160,1275 175,1260 360,1260 375,1245 375,985 440,920 1010,920 v1(1090,840)
TX_N: J1.1 U2.20 | length 566.7
  Top Layer w5: J1.1 233.3,1733.3 250.57,1733.3 307.27,1790 351.21,1790 420,1721.21 420,1581.3 514.11,1487.19 532.85,1487.19 U2.20
TX_P: J1.2 U2.21 | length 547.9
  Top Layer w5: J1.2 298.05,1721.95 270.43,1721.95 267.5,1724.88 267.5,1729.02 313.48,1775 345,1775 405,1715 405,1575.09 507.9,1472.19 532.85,1472.19 U2.21
TXD0: R8.1 U1.51 | length 1026.5
  Top Layer w8: R8.1 v1(580,1790) ; v1(695,1030) 695.47,1030 726.75,1061.28 U1.51
  Bottom Layer w8: v1(580,1790) 580,1745 460,1625 460,1360 500,1320 500,1175 645,1030 v1(695,1030)
TXD1: R7.1 U1.52 | length 1202
  Top Layer w8: R7.1 v1(515,1790) ; U1.52 741.75,1047.36 774.39,1080 v1(775,1080)
  Bottom Layer w8: v1(515,1790) 515,1715 440,1640 440,1355 480,1315 480,1165 655,990 740,990 775,1025 v1(775,1080)
TXEN: R9.1 U1.48 | length 694
  Top Layer w8: R9.1 v1(645,1790) ; v1(725,1235) 725,1216.61 U1.48
  Bottom Layer w8: v1(645,1790) 680,1755 680,1280 v1(725,1235)
VBAT: J1.23 U1.6 | length 1773
  Top Layer w6: v1(1355,1175) 1375,1195 1389.87,1195 U1.6
  Bottom Layer w8: J1.23 260,560 435,560 490,505 1055,505 1315,765 1315,1135 v1(1355,1175)
VCC: C1.2 C2.2 C3.2 C4.2 C5.2 C6.2 C14.2 CE1.2 CE2.2 CE3.2 CE4.2 F1.2 J1.25 J2.1 J2.25 J3.2 J3.26 J4.2 J4.26 R3.1 R10.1 U1.11 U1.19 U1.22 U1.28 U1.50 U1.75 U1.100 U2.9 | length 7581.8
  Top Layer w6: C3.2 995,1535 995,1503.39 U1.28 1033.44,1463.25 1065,1431.69 v1(1065,1430)
  Top Layer w8: v1(555,1045) 590,1080 600,1080 ; C1.2 590,1090 600,1090 ; R10.1 600,1080 ; U2.9 744.84,1450.16 754.68,1460 v1(755,1460) ; U1.50 719.22,1166.72 716.52,1166.72 708.52,1158.72 668.72,1158.72 600,1090 ; v1(1110,1330) 1110,1365 1150,1405 1154.45,1405 U1.22 ; v1(1110,1580) 1110,1605 1155,1650 1168.28,1650 R3.1 ; v1(1145,1330) 1200,1385 1217.97,1385 U1.19 1280,1447.03 1280,1453.85 1290.86,1464.7 C5.2 ; U1.11 1278.31,1222.64 1278.31,1146.69 1315,1110 1501.5,1110 1521.5,1090 ; v1(1550,1025) 1529.07,1025 U1.100 1521.5,1090 ; C4.2 1521.5,1090 ; 600,1080 600,1090
  Top Layer w10: CE4.2 370,210 400,240 400,435 v1(440,475) v1(475,475) ; CE1.2 355,2010 400,1965 v1(400,1900) ; F1.2@400,1800 v1(400,1865) 430,1835 665,1835 700,1800 v1(755,1800) ; v1(450,1290) C14.2 ; v1(980,475) 1030,475 1075,520 1075,649.22 1048.75,675.47 ; C6.2 1048.75,675.47 ; U1.75 1048.75,714.69 1048.75,675.47 ; U1.11 1397.73,1342.05 1413.77,1342.05 C2.2 ; v1(1665,550) v1(1700,550) 1700,525 1800,425 1800,250 1840,210 CE3.2 ; v1(1775,1775) 1825,1825 1825,1990 1845,2010 CE2.2
  Bottom Layer w8: v1(1110,1330) v1(1145,1330)
  Bottom Layer w10: v1(400,1900) 400,1775 415,1760 415,1325 v1(450,1290) 450,1150 v1(555,1045) ; v1(475,475) v1(945,475) v1(980,475) ; v1(755,1460) v1(755,1800) ; v1(1065,1430) 1090,1455 1095,1455 1140,1500 ; v1(1110,1330) 1110,1365 1195,1450 1195,1500 ; v1(1110,1580) 1110,1530 1140,1500 ; v1(1585,1025) 1585,630 v1(1665,550) v1@1665.17,549.83 ; v1(1775,1775) v1(1740,1775) 1370,1775 1280,1685 1280,1585 1195,1500 ; 1140,1500 1195,1500
VCC_F: F1.1 U2.1 U2.19 | length 627.3
  Top Layer w10: F1.1 458.54,1666.46 490,1635 v1(490,1600) 490,1560 526.61,1523.39 526.61,1509.72 527.13,1509.21 U2.19 ; v1(490,1375) 520,1375 530.2,1385.2 U2.1
  Bottom Layer w10: v1(490,1375) v1(490,1600)
VREF: C7.1 J3.5 U1.21 | length 984.5
  Top Layer w8: v1(1155.04,1374.96) v1(1155.04,1374.96) 1180.94,1400.94 1180.94,1402.27 1214.4,1435.72 1214.4,1438.07 1235,1458.67 1235,1498.85 1245.86,1509.7 C7.1
  Bottom Layer w8: v1(1155.04,1374.96) v1(1155.04,1374.96) 1260,1480 1820,1480 1850,1510 J3.5
pads on no net: U1.8 U1.9 U1.54 U2.4

## Polygon pours and split planes (outlines as drawn)
GND on Top Layer "GND_L01_P021" (solid, remove dead copper, pour order 21): 940,2220 940,2405 0,2405 0,0 2220,0 2220,2220
VCC on Top Layer "VCC_L01_P008" (solid, pour order 8): 1160,1345 1160,1315 1095,1315 1095,1345
GND on Top Layer "GND_L01_P020" (solid, pour order 20): 1605,1625 1650,1580 1670,1600 1625,1645
VCC on Top Layer "VCC_L01_P016" (solid, pour order 16): 425,460 490,460 490,490 425,490
VCC on Top Layer "VCC_L01_P015" (solid, pour order 15): 930,460 995,460 995,490 930,490
VCC on Top Layer "VCC_L01_P013" (solid, pour order 13): 1650,535 1715,535 1715,565 1650,565
VCC on Top Layer "VCC_L01_P010" (solid, pour order 10): 1535,1010 1600,1010 1600,1040 1535,1040
VCC on Top Layer "VCC_L01_P007" (solid, pour order 7): 1725,1760 1790,1760 1790,1790 1725,1790
VCC on Top Layer "VCC_L01_P004" (solid, pour order 4): 585,1075 585,1095 605,1095 605,1075
VCC on Top Layer "VCC_L01_P002" (solid, pour order 2): 385,1965 385,1850 415,1850 415,1965
VCC on Top Layer "VCC_L01_P001" (solid, pour order 1): 940,2220 940,2405 0,2405 0,1100 140,1100 140,1960 460,1960 580,2080 1640,2080 1760,1960 1960,1960 1960,1760 2080,1640 2080,1100 2220,1100 2220,2220
VCC on Top Layer "VCC_L01_P000" (solid, pour order 0): 2080,1125 2080,580 1960,460 1960,260 1760,260 1640,140 581.59,140 461.59,260 260,260 260,461.59 140,581.59 140,1125 0,1125 0,0 2220,0 2220,1125
GND on Bottom Layer "GND_L02_P019" (solid, remove dead copper, pour order 19): 940,2220 940,2405 0,2405 0,0 2220,0 2220,2220
VCC on Bottom Layer "VCC_L02_P009" (solid, pour order 9): 1095,1315 1160,1315 1160,1345 1095,1345
VCC on Bottom Layer "VCC_L02_P018" (solid, pour order 18): 425,460 490,460 490,490 425,490
VCC on Bottom Layer "VCC_L02_P017" (solid, pour order 17): 930,460 995,460 995,490 930,490
VCC on Bottom Layer "VCC_L02_P012" (solid, pour order 12): 1650,535 1715,535 1715,565 1650,565
VCC on Bottom Layer "VCC_L02_P011" (solid, pour order 11): 1535,1010 1600,1010 1600,1040 1535,1040
VCC on Bottom Layer "VCC_L02_P006" (solid, pour order 6): 1725,1760 1790,1760 1790,1790 1725,1790
VCC on Bottom Layer "VCC_L02_P003" (solid, pour order 3): 385,1850 415,1850 415,1915 385,1915

## Keep-outs
Keep-Out Layer:
  lines w20: 0,100 ccw(c100,100) 100,0 2120,0 ccw(c2120,100) 2220,100 2220,2120 ccw(c2120,2120) 2120,2220 940,2220 940,2405 0,2405 0,2220 0,100

## Silkscreen, mask and mechanical layers (free items; w line width, h text height)
Top Overlay:
  drawing of 4 lines, arcs and shapes, not listed
  text "MCU Board v1" at 420,2270.89 h80
Board Outline:
  lines w20: 0,100 ccw(c100,100) 100,0 2120,0 ccw(c2120,100) 2220,100 2220,2120 ccw(c2120,2120) 2120,2220 940,2220 940,2405 0,2405 0,2220 0,100

## Text inside footprints (layer, text, board x,y; h text height)
MCH1: Top Assembly "1" at 325,1080 h60; Top Assembly "2" at 1165,230 h60; Top Assembly "3" at 2015,1080 h60; Top Assembly "4" at 1165,1930 h60